# Altium PCB Chap-11-3.PcbDoc
Units mil, origin at the board's own origin, x right, y up, seen from the top; angles counter-clockwise.
Board outline 6000 x 4000 mil, 2 copper layers (Top Layer, Bottom Layer); 49 components, 36 nets, 147 pads, 0 vias.
Unrouted connection lines stored in the file: 86.
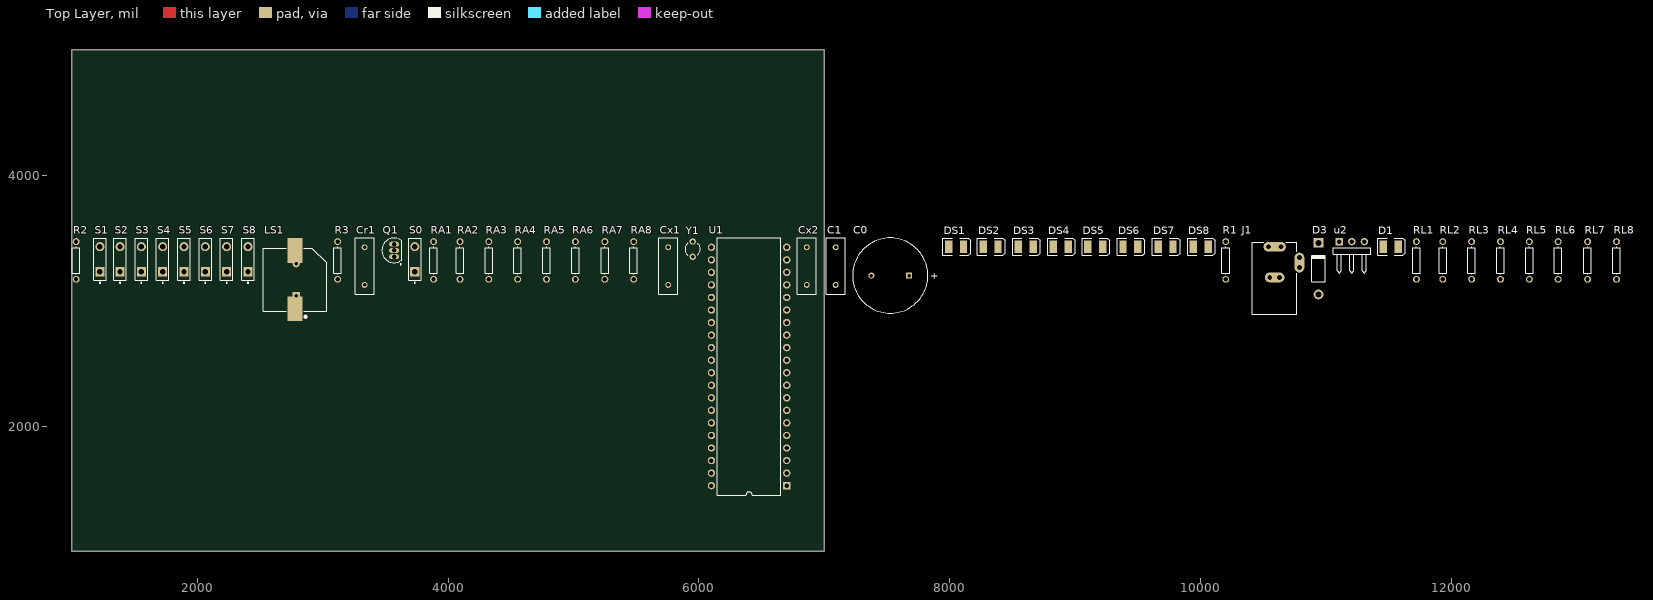
[diagram p0: Top Layer view]
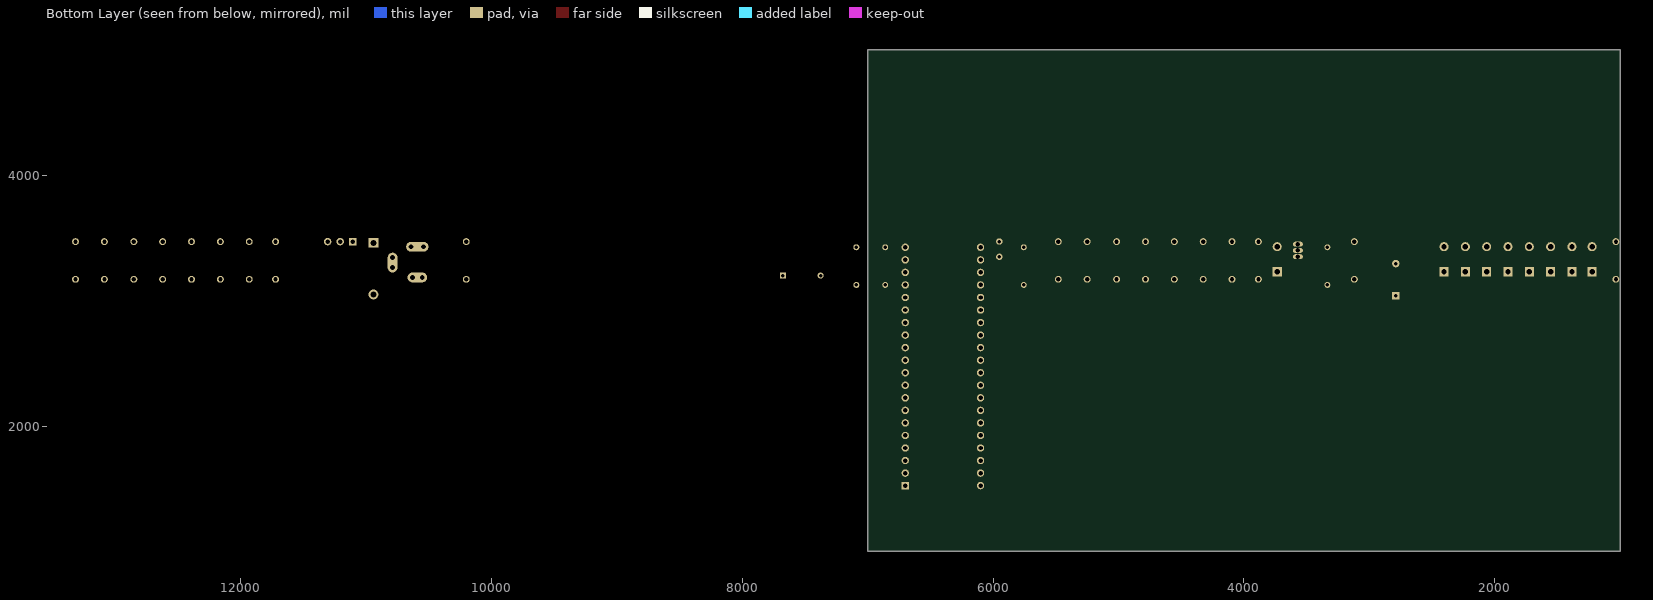
[diagram p1: Bottom Layer view, seen from below]

## Layer stack, top to bottom
Top Layer: signal copper 1.4
Dielectric: core 12.6, FR-4, Dk 4.8
Bottom Layer: signal copper 1.4

## Board outline
1000,1000 7000,1000 7000,5000 1000,5000

## Design rules (kind name [scope] priority, off if disabled: settings)
Clearance [All] p1: gap=10
PolygonConnect [All] p1: connectstyle=Relief reliefconductorwidth=10 reliefentries=4 polygonreliefangle="90 Angle"
RoomDefinition Sheet1 [InComponentClass('Sheet1')] p1: confinementstyle=ConfineIn formatcopy=TRUE lockcomponents=FALSE outline 995,1440 13470,1440 13470,3610 995,3610
RoutingVias [All] p1: holewidth=28 width=50 viastyle="Through Hole" minholewidth=28 minwidth=50 maxholewidth=28 maxwidth=50
SilkscreenOverComponentPads [All] p1: minsilkscreentomaskgap=10
SolderMaskExpansion [All] p1: expansion=4
Width [All] p1: maxlimit=10 minlimit=10 preferedwidth=10
27 further rules are at their usual default settings.

## Components (designator, comment, footprint, x,y, rotation, side; value= is the part's Value field where it differs from the comment)
C0 "Cap Pol1" RB7.6-15 7525,3200 r0 top
C1 "Cap" RAD-0.3 7090,3275 r90 top
Cr1 "Cap" RAD-0.3 3335,3275 r90 top
Cx1 "Cap" RAD-0.3 5755,3275 r90 top
Cx2 "Cap" RAD-0.3 6860,3275 r90 top
D1 "LED3" 3.5X2.8X1.9 11515,3430 r0 top
D3 "Diode 1N4006" DO-41 10940,3255 r90 top
DS1 "LED3" 3.5X2.8X1.9 8050,3430 r0 top
DS2 "LED3" 3.5X2.8X1.9 8325,3430 r0 top
DS3 "LED3" 3.5X2.8X1.9 8605,3430 r0 top
DS4 "LED3" 3.5X2.8X1.9 8885,3430 r0 top
DS5 "LED3" 3.5X2.8X1.9 9160,3430 r0 top
DS6 "LED3" 3.5X2.8X1.9 9440,3430 r0 top
DS7 "LED3" 3.5X2.8X1.9 9720,3430 r0 top
DS8 "LED3" 3.5X2.8X1.9 10000,3430 r0 top
J1 "+9V" KLD-0202 10590,2890 r90 top
LS1 "Buzzer" ABSM-1574 2780,2935 r90 top
Q1 "PNP" TO-92A 3570,3400 r0 top
R1 "Res1" AXIAL-0.3 10200,3320 r90 top
R2 "Res1" AXIAL-0.3 1035,3320 r90 top
R3 "Res1" AXIAL-0.3 3120,3320 r90 top
RA1 "Res1" AXIAL-0.3 3885,3320 r90 top
RA2 "Res1" AXIAL-0.3 4095,3320 r90 top
RA3 "Res1" AXIAL-0.3 4325,3320 r90 top
RA4 "Res1" AXIAL-0.3 4555,3320 r90 top
RA5 "Res1" AXIAL-0.3 4785,3320 r90 top
RA6 "Res1" AXIAL-0.3 5015,3320 r90 top
RA7 "Res1" AXIAL-0.3 5250,3320 r90 top
RA8 "Res1" AXIAL-0.3 5480,3320 r90 top
RL1 "Res1" AXIAL-0.3 11720,3320 r90 top
RL2 "Res1" AXIAL-0.3 11930,3320 r90 top
RL3 "Res1" AXIAL-0.3 12160,3320 r90 top
RL4 "Res1" AXIAL-0.3 12390,3320 r90 top
RL5 "Res1" AXIAL-0.3 12620,3320 r90 top
RL6 "Res1" AXIAL-0.3 12850,3320 r90 top
RL7 "Res1" AXIAL-0.3 13085,3320 r90 top
RL8 "Res1" AXIAL-0.3 13315,3320 r90 top
S0 "RESET" SPST-2 3735,3330 r90 top
S1 "SW-PB" SPST-2 1225,3330 r90 top
S2 "SW-PB" SPST-2 1385,3330 r90 top
S3 "SW-PB" SPST-2 1555,3330 r90 top
S4 "SW-PB" SPST-2 1725,3330 r90 top
S5 "SW-PB" SPST-2 1895,3330 r90 top
S6 "SW-PB" SPST-2 2065,3330 r90 top
S7 "SW-PB" SPST-2 2235,3330 r90 top
S8 "SW-PB" SPST-2 2405,3330 r90 top
U1 "AT89C51" DIP-40 6400,2475 r90 top
u2 "7805" HDR1X3H 11105,3470 r0 top
Y1 "12MHz" R38 5950,3410 r0 top

## Footprints (in the part's own frame and the unit in brackets; to place one, negate y for a bottom-side part, rotate by r counter-clockwise, add the part's x,y. Pads: shape width x height; smd on the part's side, far side on the other; paste and mask are expansions set on the pad)
3.5X2.8X1.9 [mm]
  rect 1.5x2.6 smd: 1(-1.5,0) 2(1.5,0)
  silkscreen extent -2.65,-1.7 2.95,1.7
ABSM-1574 [mm]
  rect 5x3 smd: 1(0,0) 2(11.8,0)
  rect 1.5x1.5 hole 0.7: 1A(2.65,-0.24)
  round 1.5 hole 0.7: 2A(9.15,-0.24)
  silkscreen extent -1.83,-6.4 12.3,6.4
AXIAL-0.3 [mm]
  round 1.4 hole 0.85: 1(-3.81,0) 2(3.81,0)
  silkscreen extent -2.77,-0.76 2.77,0.76
DIP-40 [mm]
  rect 1.5x1.5 hole 0.9: 1(-24.13,-7.62)
  round 1.5 hole 0.9: 2(-21.59,-7.62) 3(-19.05,-7.62) 4(-16.51,-7.62) 5(-13.97,-7.62) 6(-11.43,-7.62) 7(-8.89,-7.62) 8(-6.35,-7.62) 9(-3.81,-7.62) 10(-1.27,-7.62) 11(1.27,-7.62) 12(3.81,-7.62) 13(6.35,-7.62) 14(8.89,-7.62) 15(11.43,-7.62) 16(13.97,-7.62) 17(16.51,-7.62) 18(19.05,-7.62) 19(21.59,-7.62) 20(24.13,-7.62) 21(24.13,7.62) 22(21.59,7.62) 23(19.05,7.62) 24(16.51,7.62) 25(13.97,7.62) 26(11.43,7.62) 27(8.89,7.62) 28(6.35,7.62) 29(3.81,7.62) 30(1.27,7.62) 31(-1.27,7.62) 32(-3.81,7.62) 33(-6.35,7.62) 34(-8.89,7.62) 35(-11.43,7.62) 36(-13.97,7.62) 37(-16.51,7.62) 38(-19.05,7.62) 39(-21.59,7.62) 40(-24.13,7.62)
  silkscreen extent -26.05,-6.45 26.05,6.45
DO-41 [mm]
  round 2 hole 1.2: 1(-5.23,0)
  rect 2x2 hole 1.2: 2(5.23,0)
  silkscreen extent -2.65,-1.4 2.75,1.4
HDR1X3H [mm]
  rect 1.5x1.5 hole 0.9: 1(0,0)
  round 1.5 hole 0.9: 2(2.54,0) 3(5.08,0)
  silkscreen extent -1.27,-6.35 6.35,-1.27
KLD-0202 [mm]
  oval 2x4.5 all layers, no hole: 1(13.7,0)
  round 1.5 hole 1: 1A(13.7,-1.25) 1B(13.7,1.25) 2A(7.5,-1) 2B(7.5,1) 3A(9.5,-5) 3B(11.5,-5)
  oval 2x4 all layers, no hole: 2(7.5,0)
  oval 4x2 all layers, no hole: 3(10.5,-5)
  silkscreen extent 0,-4.5 14.6,4.5
R38 [mm]
  round 1.3 hole 0.7: 1(0,1.55) 2(0,-1.55)
  silkscreen extent -1.55,-1.19 1.55,1.17
RAD-0.3 [mm]
  round 1.2 hole 0.7: 1(-3.81,0) 2(3.81,0)
  silkscreen extent -5.71,-1.91 5.71,1.91
RB7.6-15 [mm]
  rect 1.2x1.2 hole 0.7: 1(3.81,0)
  round 1.2 hole 0.7: 2(-3.81,0)
  silkscreen extent -7.62,-7.62 7.62,7.62
SPST-2 [mm]
  rect 1.85x1.85 hole 1.1: 1(-2.54,0)
  round 1.85 hole 1.1: 2(2.54,0)
  silkscreen extent -4.89,-1.27 4.28,1.27
TO-92A [mm]
  oval 2x1 hole 0.9: 1(0,-1.27) 2(0,0) 3(0,1.27)
  silkscreen extent -2.48,-2.95 1.5,2.48, body extent -2.5,-2.5 1.5,2.5, height 6.86

## Part data
C0: "Polarized Capacitor (Ra"
C1 Cr1 Cx1 Cx2: "Capa"
D1 DS1 DS2 DS3 DS4 DS5 DS6 DS7 DS8: "Typical BLUE Si"
D3: "1 Amp General Purpose Rect"
J1: library part PWR2.5, "Low Voltage Power Supply Conn"
LS1: "Magnetic Transducer B"
Q1: library part 2N3906, "PNP General Purpose Ampl"
R1 R2 R3 RA1 RA2 RA3 RA4 RA5 RA6 RA7 RA8 RL1 RL2 RL3 RL4 RL5 RL6 RL7 RL8: "Res"
S0: library part SW-PB, "S"
S1 S2 S3 S4 S5 S6 S7 S8: "S"
U1: "8-Bit Microcontroller with 4K Flas"
u2: library part "Header 3H", "Header, 3-Pin, Right"
Y1: library part XTAL, "Crystal Oscil"

## Nets (pads, with @x,y where several pads share a name; then routed paths per layer and width w, separated by ;. In a path a pad name is that pad's centre, name@x,y a point inside that pad or via, vN(x,y) a via of type N, cw(c..) or ccw(c..) an arc to the next point about the centre after c; other vN are vias at no path point)
BUZZER: R3.1 U1.17
GND: C0.2 C1.1 Cx1.1 Cx2.1 J1.2 J1.2A J1.2B LS1.2 LS1.2A R1.1 R2.1 S1.1 S2.1 S3.1 S4.1 S5.1 S6.1 S7.1 S8.1 U1.20 u2.2
LED1: DS1.2 U1.32
LED2: DS2.2 U1.33
LED3: DS3.2 U1.34
LED4: DS4.2 U1.35
LED5: DS5.2 U1.36
LED6: DS6.2 U1.37
LED7: DS7.2 U1.38
LED8: DS8.2 U1.39
NetC0_1: C0.1 D3.2 u2.1
NetD1_2: D1.2 R1.2
NetD3_1: D3.1 J1.1 J1.1A J1.1B
NetDS1_1: DS1.1 RL1.1
NetDS2_1: DS2.1 RL2.1
NetDS3_1: DS3.1 RL3.1
NetDS4_1: DS4.1 RL4.1
NetDS5_1: DS5.1 RL5.1
NetDS6_1: DS6.1 RL6.1
NetDS7_1: DS7.1 RL7.1
NetDS8_1: DS8.1 RL8.1
NetJ1_3: J1.3 J1.3A J1.3B
NetLS1_1: LS1.1 LS1.1A Q1.3
NetQ1_2: Q1.2 R3.2
NetRA1_1: RA1.1 S1.2 U1.21
NetRA2_1: RA2.1 S2.2 U1.22
NetRA3_1: RA3.1 S3.2 U1.23
NetRA4_1: RA4.1 S4.2 U1.24
NetRA5_1: RA5.1 S5.2 U1.25
NetRA6_1: RA6.1 S6.2 U1.26
NetRA7_1: RA7.1 S7.2 U1.27
NetRA8_1: RA8.1 S8.2 U1.28
RESET: Cr1.1 R2.2 S0.1 U1.9
VCC: C1.2 Cr1.2 D1.1 Q1.1 RA1.2 RA2.2 RA3.2 RA4.2 RA5.2 RA6.2 RA7.2 RA8.2 RL1.2 RL2.2 RL3.2 RL4.2 RL5.2 RL6.2 RL7.2 RL8.2 S0.2 U1.31 U1.40 u2.3
XTAL1: Cx2.2 U1.19 Y1.2
XTAL2: Cx1.2 U1.18 Y1.1
pads on no net: U1.1 U1.2 U1.3 U1.4 U1.5 U1.6 U1.7 U1.8 U1.10 U1.11 U1.12 U1.13 U1.14 U1.15 U1.16 U1.29 U1.30

## Text inside footprints (layer, text, board x,y; h text height)
C0: Top Overlay "+" at 7845.15,3170.99 h59.06
J1: Mechanical 1 "Mech 2 - Clearance, move to internal plane if present" at 10390.56,2901.26 h11.81 r90; Mechanical 1 "Mech 1 - Slot cut-out" at 10370.87,2901.26 h11.81 r90; Mechanical 1 "Assign keep-out area to slot" at 10331.5,2901.26 h11.81 r90; Mechanical 1 "Alert PCB fab to slot details" at 10351.18,2901.26 h11.81 r90